# Altium PCB JY925带孔封装.PcbDoc
Units mil, origin at the board's own origin, x right, y up, seen from the top; angles counter-clockwise.
Board outline 6000 x 4000 mil, 4 copper layers (Top Layer, GND, Signal, Bottom Layer); 4 components, 23 nets, 24 pads, 0 vias.
Unrouted connection lines stored in the file: 1.
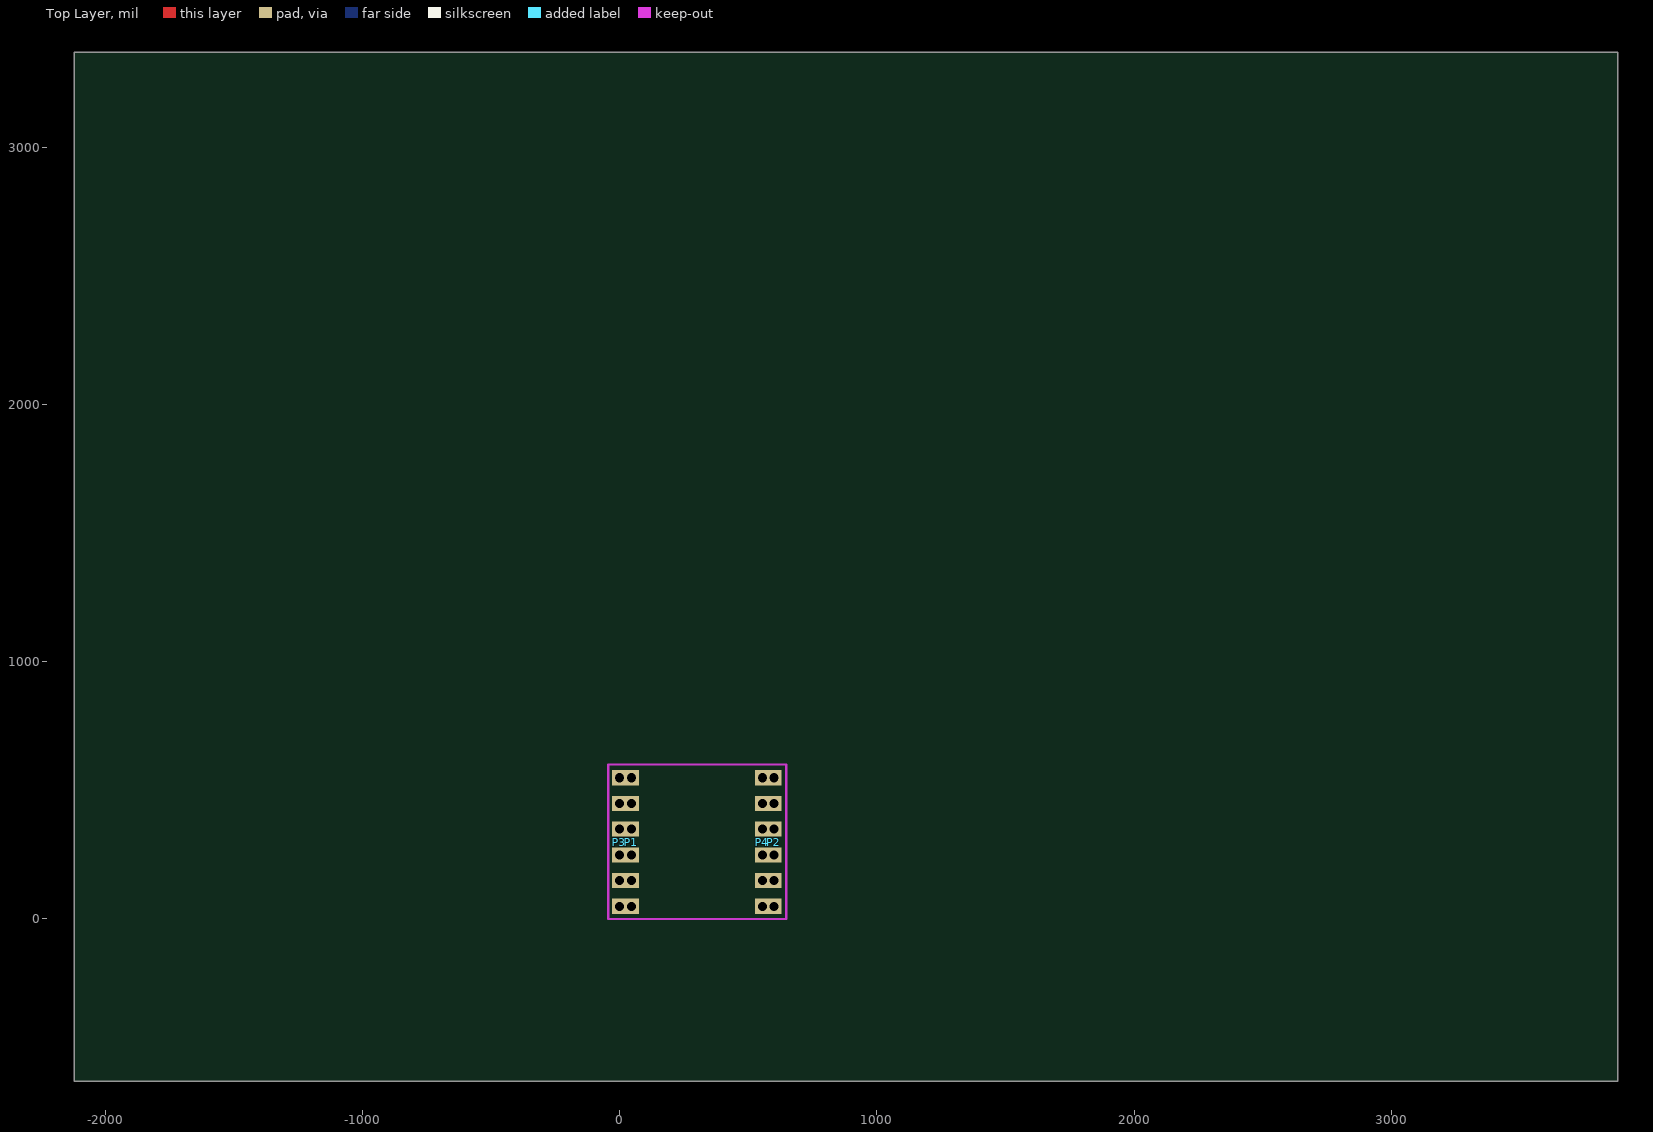
[diagram p0: Top Layer view]
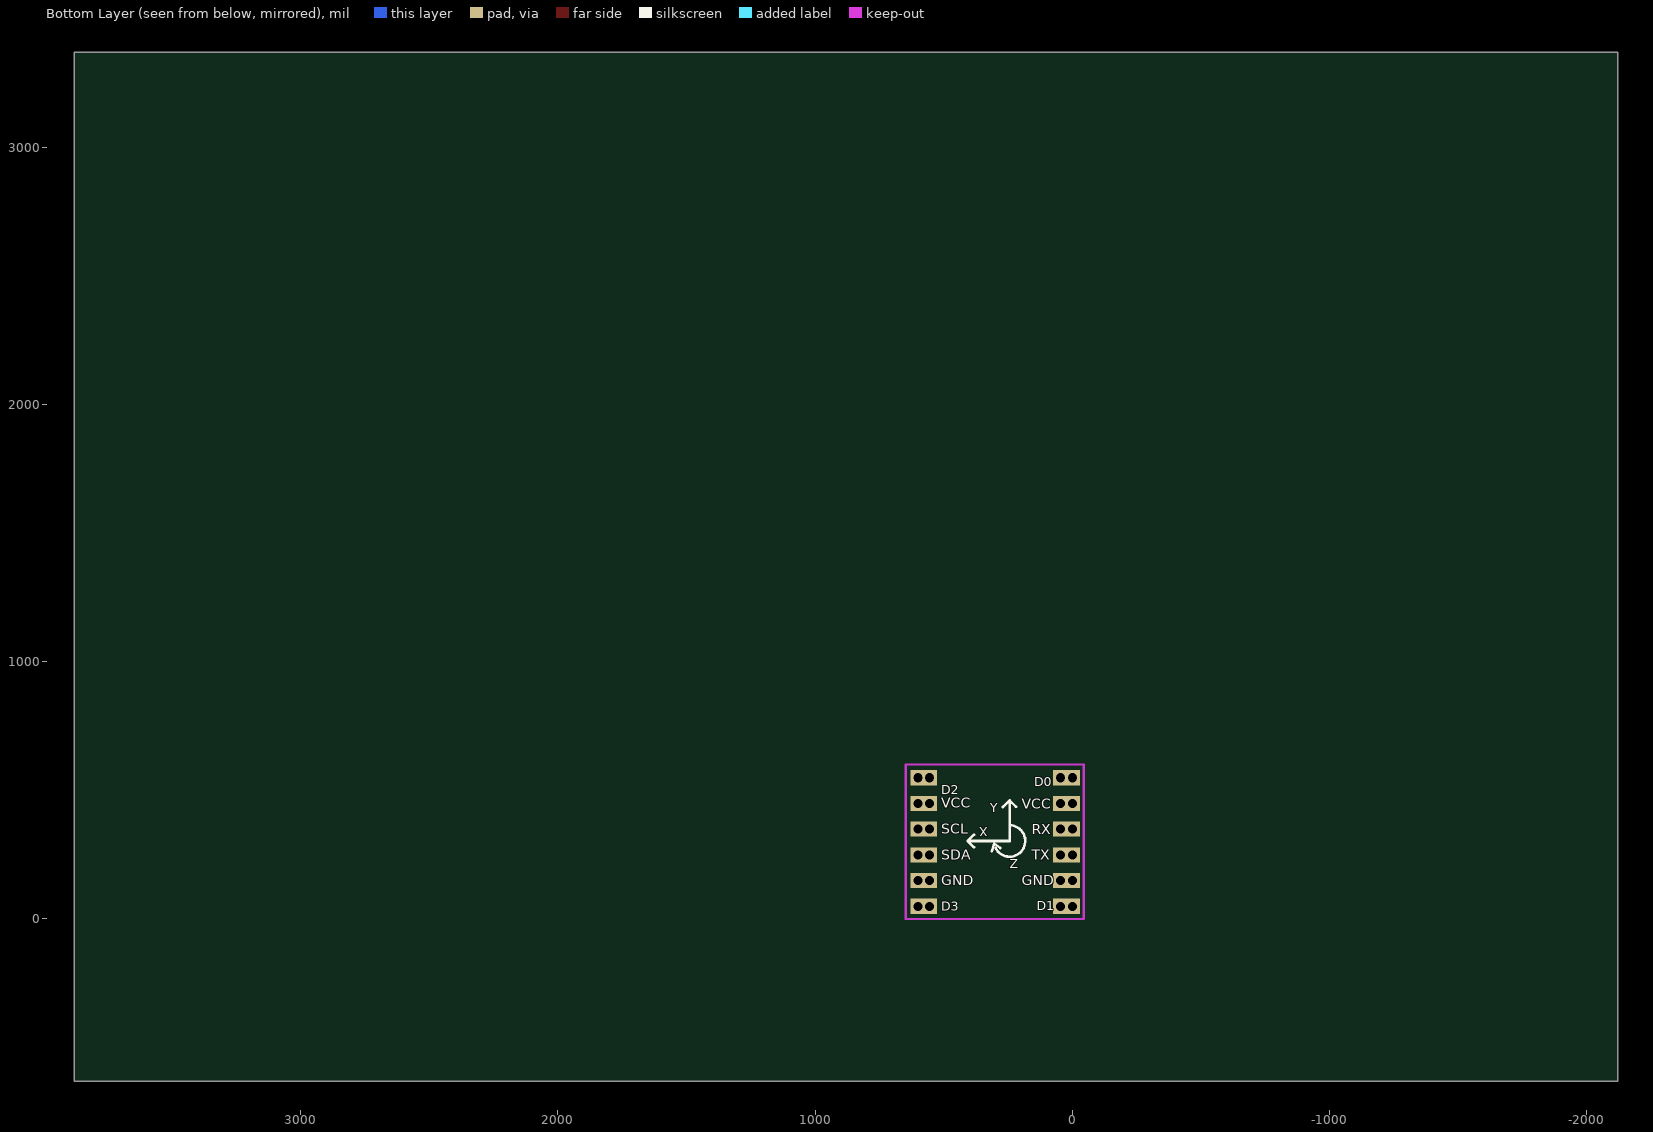
[diagram p1: Bottom Layer view, seen from below]
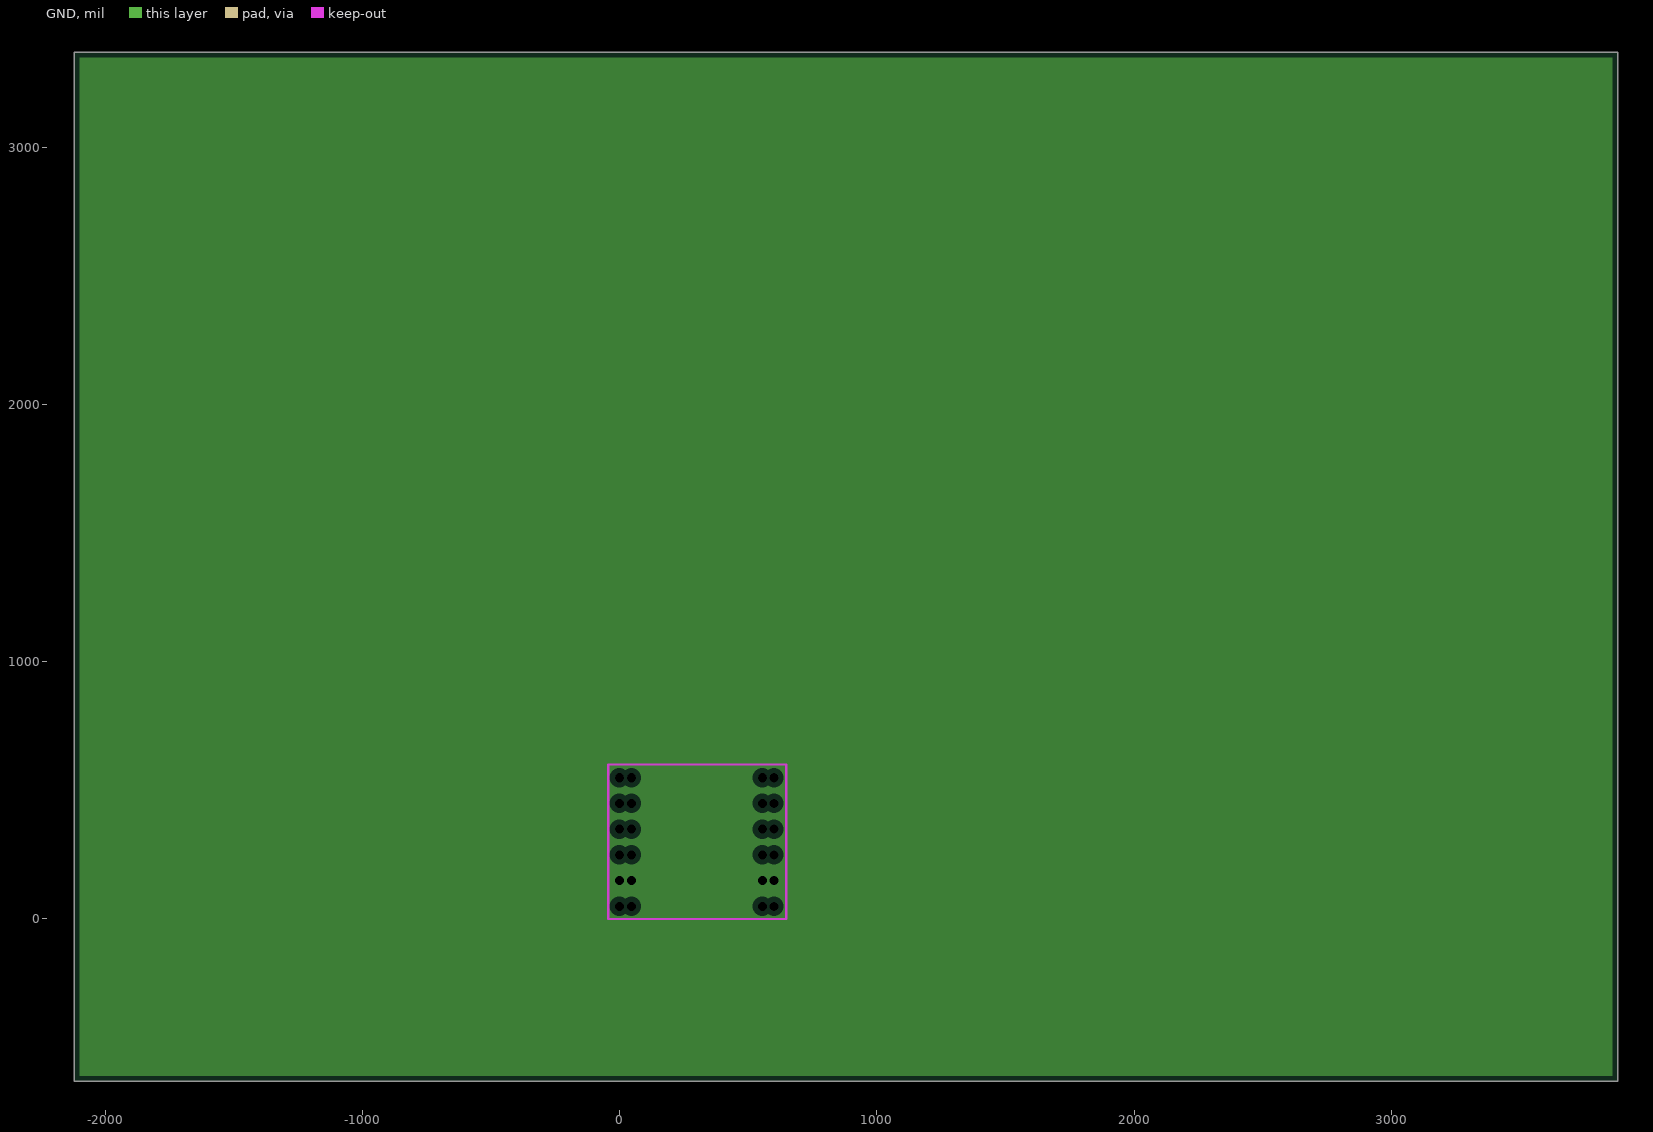
[diagram p2: GND, clearances drawn from the general rule]

## Layer stack, top to bottom
Top Layer: signal copper 1.4
Dielectric: core 12.6, FR-4, Dk 4.8
GND: plane copper 1.4, net GND
Dielectric: prepreg 12.6, FR-4, Dk 4.8
Signal: signal copper 1.4
Dielectric: core 12.6, FR-4, Dk 4.8
Bottom Layer: signal copper 1.4

## Board outline
-2120,-631 3880,-631 3880,3369 -2120,3369

## Design rules (kind name [scope] priority, off if disabled: settings)
Clearance [All] p1: gap=6
ComponentClearance [All] p1: gap=8 collisioncheckmode=3 verticalgap=10 showdistances=FALSE
FabricationTestpoint [(IsPad And (OnTopLayer Or OnBottomLayer))] p1: side=3 testpointundercomponent=TRUE minsize=40 maxsize=100 preferedsize=60 minholesize=0 maxholesize=40 preferedholesize=32 testpointgrid=1 allowsidetop=TRUE allowsidebottom=TRUE usegrid=TRUE gridtolerance=0.01
PlaneClearance [All] p1: clearance=20
PlaneConnect [All] p1: planeconnectstyle=Relief reliefexpansion=20 reliefentries=4 reliefconductorwidth=10 reliefairgap=10
PolygonConnect [All] p1: connectstyle=Relief reliefconductorwidth=10 reliefentries=4 polygonreliefangle="90 Angle"
RoutingVias [All] p1: holewidth=14 width=28 viastyle="Through Hole" minholewidth=12 minwidth=24 maxholewidth=28 maxwidth=50
SilkscreenOverComponentPads [All] p1: minsilkscreentomaskgap=10
SolderMaskExpansion [All] p1: expansion=4
Width [All] p1: maxlimit=10 minlimit=6 preferedwidth=6
23 further rules are at their usual default settings.

## Components (designator, comment, footprint, x,y, rotation, side; value= is the part's Value field where it differs from the comment)
P1 "Header 6" HDR1X6 46,549 r270 top locked
P2 "Header 6" HDR1X6 600,549 r270 top locked
P3 "Header 6" HDR1X6 -1,549 r270 top locked (schematic designator P1)
P4 "Header 6" HDR1X6 555,549 r270 top locked (schematic designator P2)

## Footprints (in the part's own frame and the unit in brackets; to place one, negate y for a bottom-side part, rotate by r counter-clockwise, add the part's x,y. Pads: shape width x height; smd on the part's side, far side on the other; paste and mask are expansions set on the pad)
HDR1X6 [mm] "Connector; Header; 6 Position"
  rect 1.5x1.5 hole 0.9: 1(0,0) 2(2.54,0) 3(5.08,0) 4(7.62,0) 5(10.16,0) 6(12.7,0)

## Part data
P1 P2 P3 P4: "Header, 6-Pin"

## Nets (pads, with @x,y where several pads share a name; then routed paths per layer and width w, separated by ;. In a path a pad name is that pad's centre, name@x,y a point inside that pad or via, vN(x,y) a via of type N, cw(c..) or ccw(c..) an arc to the next point about the centre after c; other vN are vias at no path point)
+5V: P1.2 P2.2 P3.2 P4.2
CSB: 
D0: P1.1 P3.1
D1: P1.6 P3.6
D2: P2.1 P4.1
D3: P2.6 P4.6
GND: P1.5 P2.5 P3.5 P4.5
INT: 
LED1: 
MISO: 
MOSI: 
NCS: 
NetC5_1: 
NetC13_1: 
NetD3_1: 
RX: P1.3 P3.3
SCK: 
SCL2: P2.3 P4.3
SDA2: P2.4 P4.4
SWCLK: 
SWDIO: 
TX: P1.4 P3.4
VCC: 

## Polygon pours and split planes (outlines as drawn)
GND on GND (split plane): 3859.9,-610.9 -2099.9,-610.9 -2099.9,3348.9 3859.9,3348.9

## Keep-outs
Keep-Out Layer:
  lines w7: -45,0 648,0 ; -45,600 648,600 ; -1,600 599,600
  lines w10: -45,0 -45,600 ; 648,0 648,600

## Silkscreen, mask and mechanical layers (free items; w line width, h text height)
Bottom Overlay:
  lines w10: 219,436 244,461 244,303 407,303 ; 244,364.03 ccw(c244,303) 298.59,275.71 ; 245,460 270,435 ; 280.13,275.62 304,293 312.94,262.45 ; 382,278 407,303 ; 382,328 407,303
  text "D0" at 147.8,516.5 h35
  text "D2" at 509.9,485.1 h35
  text "VCC" at 510,431.6 h40
  text "VCC" at 197,427.4 h40
  text "Y" at 290,415 h35
  text "X" at 362,356 h35 r180
  text "SCL" at 510,331.2 h40
  text "RX" at 157.01,328.8 h40
  text "SDA" at 510,230.8 h40
  text "TX" at 157.01,230.2 h40
  text "Z" at 242.6,197.6 h35
  text "GND" at 197,131.6 h40
  text "GND" at 510,130.4 h40
  text "D1" at 138.02,34 h35
  text "D3" at 509,31 h35